# Altium PCB Copy of Bodge10080.PcbDoc
Units mm, origin at the board's own origin, x right, y up, seen from the top; angles counter-clockwise.
Board outline 100 x 80 mm, 2 copper layers (Top Layer, Bottom Layer); 8 components, 30 nets, 630 pads, 72 vias.
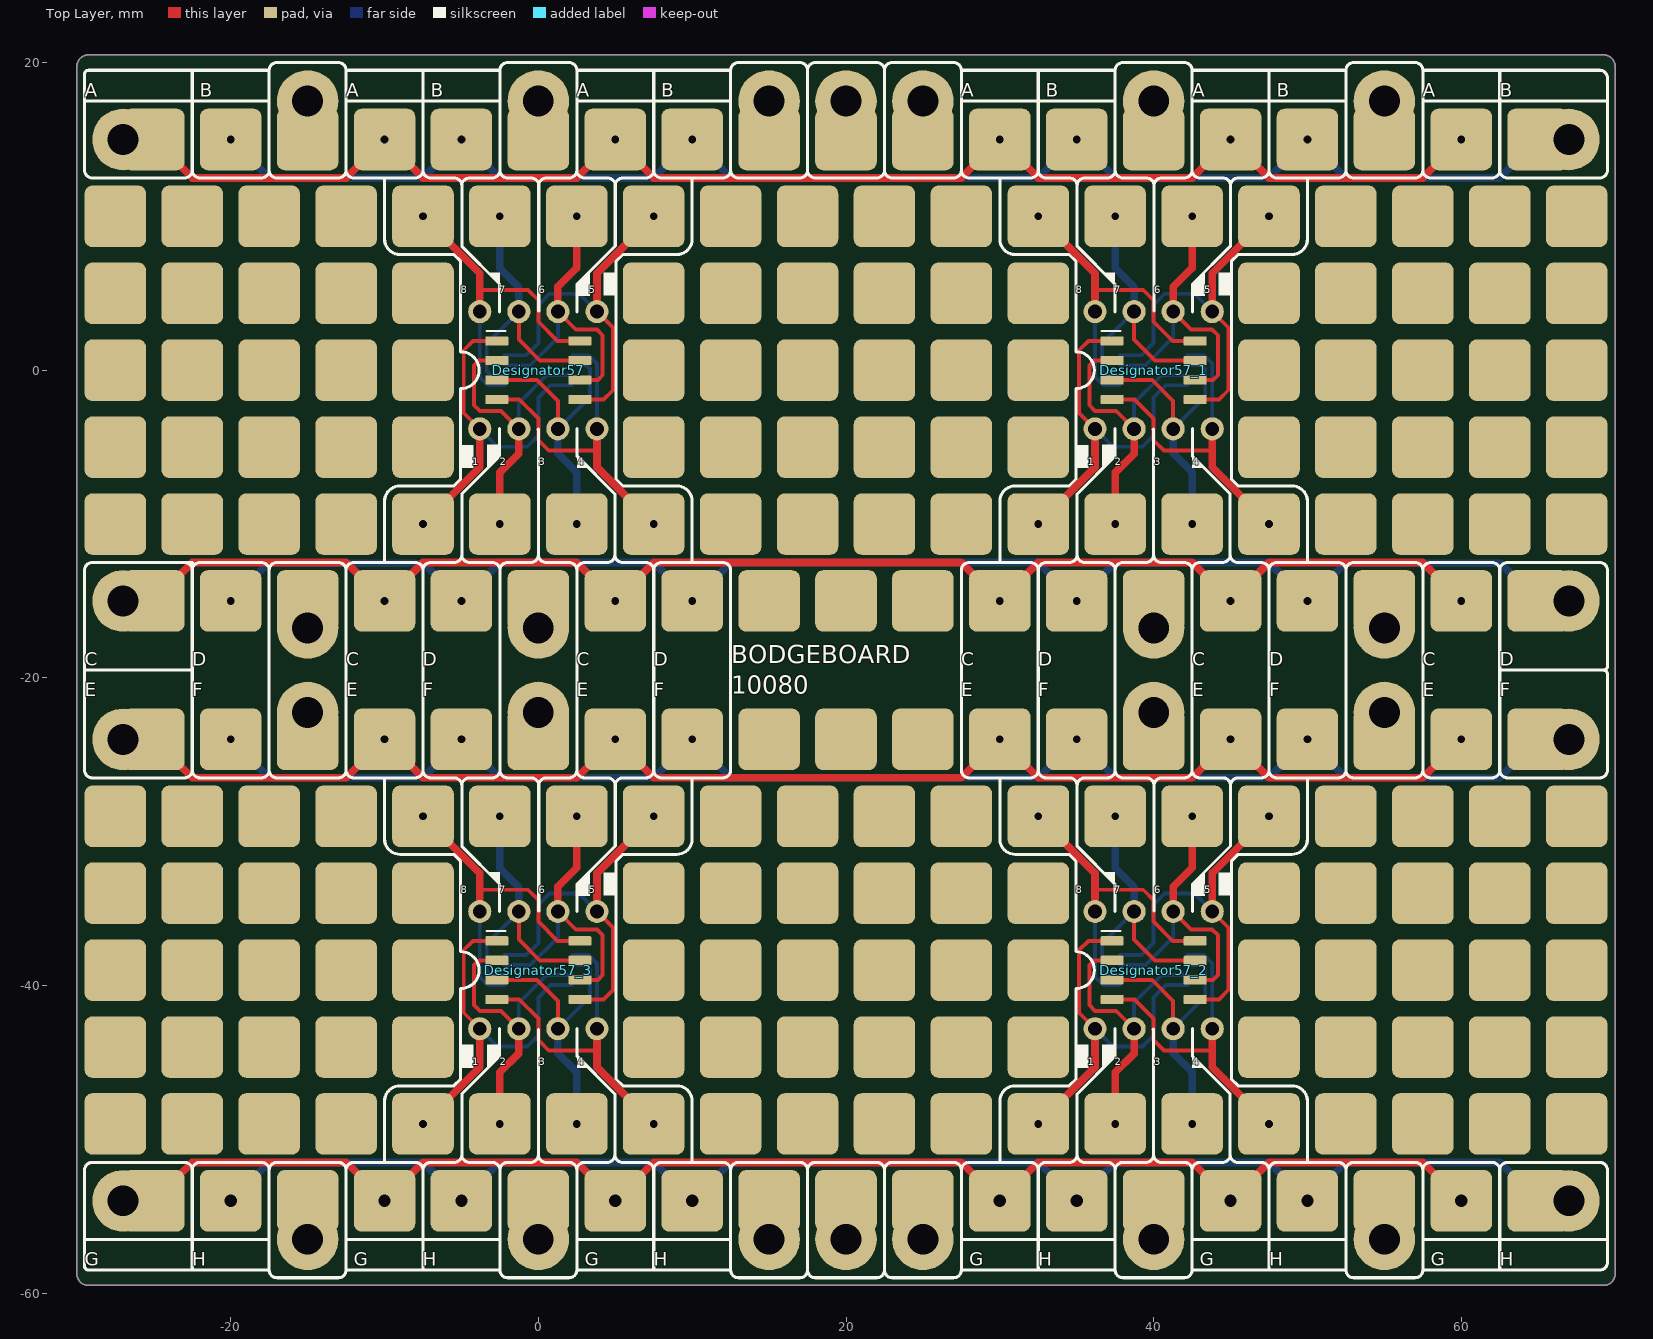
[diagram p0: Top Layer view]
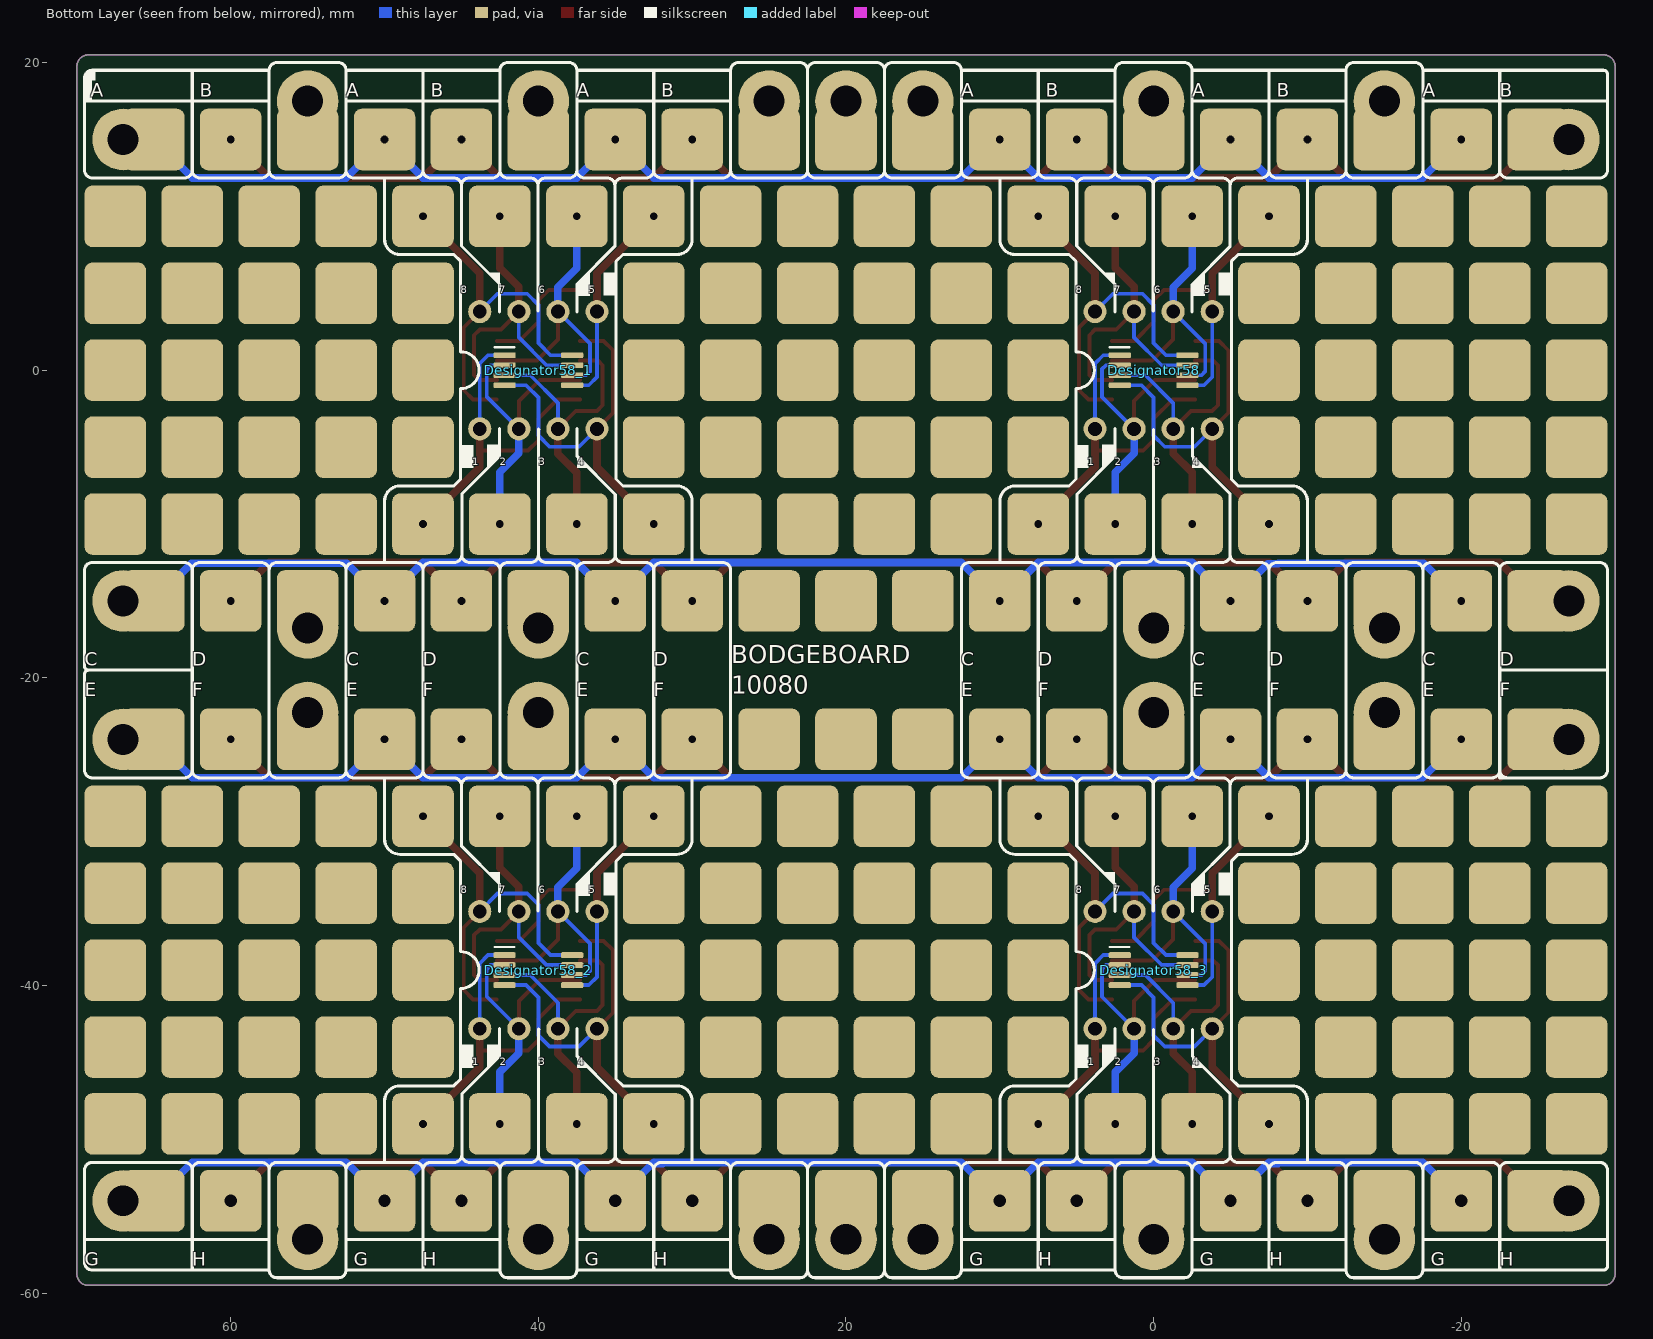
[diagram p1: Bottom Layer view, seen from below]

## Layer stack, top to bottom
Top Solder: solder mask 0.0102, Solder Resist, Dk 3.5
Top Layer: signal copper 0.0356
Dielectric 1: dielectric 0.32, FR-4, Dk 4.8
Bottom Layer: signal copper 0.0356
Bottom Solder: solder mask 0.0102, Solder Resist, Dk 3.5

## Board outline
-30,-58.75 -30,19.75 cw(c-29.25,19.75) -29.25,20.5 69.25,20.5 cw(c69.25,19.75) 70,19.75 70,-58.75 cw(c69.25,-58.75) 69.25,-59.5 -29.25,-59.5 cw(c-29.25,-58.75)

## Design rules (kind name [scope] priority, off if disabled: settings)
Clearance [All] p1: gap=0.2 ignorepadtopadclearanceinfootprint=FALSE
MinimumSolderMaskSliver [All] p1: minsoldermaskwidth=0.15
PolygonConnect [All] p1: connectstyle=Relief reliefconductorwidth=0.254 reliefentries=4 polygonreliefangle="90 Angle" airgapwidth=0.254
RoutingVias [All] p1: holewidth=0.4 width=0.8 viastyle="Through Hole" minholewidth=0.3 minwidth=0.4 maxholewidth=0.7 maxwidth=1
SilkToSilkClearance [All] p1 off: silktosilkclearance=0
SilkToSolderMaskClearance [IsPad] p1: minsilkscreentomaskgap=0.15 clearancetoexposedcopper=TRUE
SolderMaskExpansion [All] p1: expansion=0.102 istentingtop=FALSE
Width [All] p1: maxlimit=1 minlimit=0.2 preferedwidth=0.5
27 further rules are at their usual default settings.

## Components (designator, comment, footprint, x,y, rotation, side; value= is the part's Value field where it differs from the comment)
Designator57 "Comment" SO127P600X500-8 0,0 r0 top locked
Designator57_1 "Comment" SO127P600X500-8 40,0 r0 top locked
Designator57_2 "Comment" SO127P600X500-8 40,-39 r0 top locked
Designator57_3 "Comment" SO127P600X500-8 0,-39 r0 top locked
Designator58 "Comment" SO65P490X300-8 0,0 r180 bottom locked
Designator58_1 "Comment" SO65P490X300-8 40,0 r180 bottom locked
Designator58_2 "Comment" SO65P490X300-8 40,-39 r180 bottom locked
Designator58_3 "Comment" SO65P490X300-8 0,-39 r180 bottom locked

## Footprints (in the part's own frame and the unit in brackets; to place one, negate y for a bottom-side part, rotate by r counter-clockwise, add the part's x,y. Pads: shape width x height; smd on the part's side, far side on the other; paste and mask are expansions set on the pad)
SO65P490X300-8 [mm] "SO 0.65mm Pitch , 4.9mm Span, 3.00mm Body width, 8 Pins"
  rrect50% 1.45x0.38 smd paste+0 mask+0.05: 1(-2.2,0.975) 2(-2.2,0.325) 3(-2.2,-0.325) 4(-2.2,-0.975) 5(2.2,-0.975) 6(2.2,-0.325) 7(2.2,0.325) 8(2.2,0.975)
  silkscreen extent -2.85,1.5 -1.58,1.5, body extent -2.45,-1.5 2.45,1.5, height 1.1
SO127P600X500-8 [mm] "SO 1.27mm Pitch, 6.00mm Span, 5mm Body Width, 8 Pins"
  rrect25% 1.5x0.6 smd paste+0 mask+0.05: 1(-2.7,1.905) 2(-2.7,0.635) 3(-2.7,-0.635) 4(-2.7,-1.905) 5(2.7,-1.905) 6(2.7,-0.635) 7(2.7,0.635) 8(2.7,1.905)
  silkscreen extent -3.38,2.55 -2.15,2.55, body extent -3,-2.5 3,2.5, height 1.75

## Free pads (board coordinates)
  rrect25% 4x4 smd mask+0.1: 1(-27.5,-49) 1(-27.5,-44) 1(-27.5,-39) 1(-27.5,-34) 1(-27.5,-29) 1(-27.5,-10) 1(-27.5,-5) 1(-27.5,0) 1(-27.5,5) 1(-27.5,10) 3(-22.5,-49) 3(-22.5,-44) 3(-22.5,-39) 3(-22.5,-34) 3(-22.5,-29) 3(-22.5,-10) 3(-22.5,-5) 3(-22.5,0) 3(-22.5,5) 3(-22.5,10) 4(-17.5,-49) 4(-17.5,-44) 4(-17.5,-39) 4(-17.5,-34) 4(-17.5,-29) 4(-17.5,-10) 4(-17.5,-5) 4(-17.5,0) 4(-17.5,5) 4(-17.5,10) 5(-12.5,-49) 5(-12.5,-44) 5(-12.5,-39) 5(-12.5,-34) 5(-12.5,-29) 5(-12.5,-10) 5(-12.5,-5) 5(-12.5,0) 5(-12.5,5) 5(-12.5,10) 6(-7.5,-49) 6(-7.5,-44) 6(-7.5,-39) 6(-7.5,-34) 6(-7.5,-29) 6(-7.5,-10) 6(-7.5,-5) 6(-7.5,0) 6(-7.5,5) 6(-7.5,10) 6(32.5,-49) 6(32.5,-44) 6(32.5,-39) 6(32.5,-34) 6(32.5,-29) 6(32.5,-10) 6(32.5,-5) 6(32.5,0) 6(32.5,5) 6(32.5,10) 7(-2.5,-49) 7(-2.5,-29) 7(-2.5,-10) 7(-2.5,10) 7(37.5,-49) 7(37.5,-29) 7(37.5,-10) 7(37.5,10) 8(2.5,-49) 8(2.5,-29) 8(2.5,-10) 8(2.5,10) 8(42.5,-49) 8(42.5,-29) 8(42.5,-10) 8(42.5,10) 9(7.5,-49) 9(7.5,-44) 9(7.5,-39) 9(7.5,-34) 9(7.5,-29) 9(7.5,-10) 9(7.5,-5) 9(7.5,0) 9(7.5,5) 9(7.5,10) 9(47.5,-49) 9(47.5,-44) 9(47.5,-39) 9(47.5,-34) 9(47.5,-29) 9(47.5,-10) 9(47.5,-5) 9(47.5,0) 9(47.5,5) 9(47.5,10) 10(12.5,-49) 10(12.5,-44) 10(12.5,-39) 10(12.5,-34) 10(12.5,-29) 10(12.5,-10) 10(12.5,-5) 10(12.5,0) 10(12.5,5) 10(12.5,10) 11(17.5,-49) 11(17.5,-44) 11(17.5,-39) 11(17.5,-34) 11(17.5,-29) 11(17.5,-10) 11(17.5,-5) 11(17.5,0) 11(17.5,5) 11(17.5,10) 12(22.5,-49) 12(22.5,-44) 12(22.5,-39) 12(22.5,-34) 12(22.5,-29) 12(22.5,-10) 12(22.5,-5) 12(22.5,0) 12(22.5,5) 12(22.5,10) 13(27.5,-49) 13(27.5,-44) 13(27.5,-39) 13(27.5,-34) 13(27.5,-29) 13(27.5,-10) 13(27.5,-5) 13(27.5,0) 13(27.5,5) 13(27.5,10) 18(52.5,-49) 18(52.5,-44) 18(52.5,-39) 18(52.5,-34) 18(52.5,-29) 18(52.5,-10) 18(52.5,-5) 18(52.5,0) 18(52.5,5) 18(52.5,10) 19(57.5,-49) 19(57.5,-44) 19(57.5,-39) 19(57.5,-34) 19(57.5,-29) 19(57.5,-10) 19(57.5,-5) 19(57.5,0) 19(57.5,5) 19(57.5,10) 20(62.5,-49) 20(62.5,-44) 20(62.5,-39) 20(62.5,-34) 20(62.5,-29) 20(62.5,-10) 20(62.5,-5) 20(62.5,0) 20(62.5,5) 20(62.5,10) 21(67.5,-49) 21(67.5,-44) 21(67.5,-39) 21(67.5,-34) 21(67.5,-29) 21(67.5,-10) 21(67.5,-5) 21(67.5,0) 21(67.5,5) 21(67.5,10) 23(60,-54) 23(60,-24) 23(60,-15) 23(60,15) 25(50,-54) 25(50,-24) 25(50,-15) 25(50,15) 26(45,-54) 26(45,-24) 26(45,-15) 26(45,15) 28(35,-54) 28(35,-24) 28(35,-15) 28(35,15) 29(30,-54) 29(30,-24) 29(30,-15) 29(30,15) 30(25,-24) 30(25,-15) 31(20,-24) 31(20,-15) 32(15,-24) 32(15,-15) 33(10,-54) 33(10,-24) 33(10,-15) 33(10,15) 34(5,-54) 34(5,-24) 34(5,-15) 34(5,15) 36(-5,-54) 36(-5,-24) 36(-5,-15) 36(-5,15) 37(-10,-54) 37(-10,-24) 37(-10,-15) 37(-10,15) 39(-20,-54) 39(-20,-24) 39(-20,-15) 39(-20,15)
  round 4 hole 2 mask-0.5: 1(-27,-54) 1(-27,-24) 1(-27,-15) 1(-27,15) 1(-15,-56.5) 1(-15,-22.25) 1(-15,-16.75) 1(-15,17.5) 1(0,-22.25) 1(0,-16.75) 1(0,-56.5) 1(0,17.5) 1(15,-56.5) 1(15,17.5) 1(20,-56.5) 1(20,17.5) 1(25,-56.5) 1(25,17.5) 1(40,-56.5) 1(40,17.5) 1(40,-22.25) 1(40,-16.75) 1(55,-56.5) 1(55,-22.25) 1(55,-16.75) 1(55,17.5) 2(67,-54) 2(67,-24) 2(67,-15) 2(67,15)
  round 1.5 hole 0.9: 1(-3.81,-42.81) 1(-3.81,-3.81) 1(36.19,-42.81) 1(36.19,-3.81) 2(-1.27,-42.81) 2(-1.27,-3.81) 2(38.73,-42.81) 2(38.73,-3.81) 3(1.27,-42.81) 3(1.27,-3.81) 3(41.27,-42.81) 3(41.27,-3.81) 4(3.81,-42.81) 4(3.81,-3.81) 4(43.81,-42.81) 4(43.81,-3.81) 5(3.81,-35.19) 5(3.81,3.81) 5(43.81,-35.19) 5(43.81,3.81) 6(1.27,-35.19) 6(1.27,3.81) 6(41.27,-35.19) 6(41.27,3.81) 7(-1.27,-35.19) 7(-1.27,3.81) 7(38.73,-35.19) 7(38.73,3.81) 8(-3.81,-35.19) 8(-3.81,3.81) 8(36.19,-35.19) 8(36.19,3.81)
  rrect25% 4x4 smd far side mask+0.1: 1(67.5,-49) 1(67.5,-44) 1(67.5,-39) 1(67.5,-34) 1(67.5,-29) 1(67.5,-10) 1(67.5,-5) 1(67.5,0) 1(67.5,5) 1(67.5,10) 3(62.5,-49) 3(62.5,-44) 3(62.5,-39) 3(62.5,-34) 3(62.5,-29) 3(62.5,-10) 3(62.5,-5) 3(62.5,0) 3(62.5,5) 3(62.5,10) 4(57.5,-49) 4(57.5,-44) 4(57.5,-39) 4(57.5,-34) 4(57.5,-29) 4(57.5,-10) 4(57.5,-5) 4(57.5,0) 4(57.5,5) 4(57.5,10) 5(52.5,-49) 5(52.5,-44) 5(52.5,-39) 5(52.5,-34) 5(52.5,-29) 5(52.5,-10) 5(52.5,-5) 5(52.5,0) 5(52.5,5) 5(52.5,10) 10(27.5,-49) 10(27.5,-44) 10(27.5,-39) 10(27.5,-34) 10(27.5,-29) 10(27.5,-10) 10(27.5,-5) 10(27.5,0) 10(27.5,5) 10(27.5,10) 11(22.5,-49) 11(22.5,-44) 11(22.5,-39) 11(22.5,-34) 11(22.5,-29) 11(22.5,-10) 11(22.5,-5) 11(22.5,0) 11(22.5,5) 11(22.5,10) 12(17.5,-49) 12(17.5,-44) 12(17.5,-39) 12(17.5,-34) 12(17.5,-29) 12(17.5,-10) 12(17.5,-5) 12(17.5,0) 12(17.5,5) 12(17.5,10) 13(12.5,-49) 13(12.5,-44) 13(12.5,-39) 13(12.5,-34) 13(12.5,-29) 13(12.5,-10) 13(12.5,-5) 13(12.5,0) 13(12.5,5) 13(12.5,10) 14(7.5,-49) 14(7.5,-44) 14(7.5,-39) 14(7.5,-34) 14(7.5,-29) 14(7.5,-10) 14(7.5,-5) 14(7.5,0) 14(7.5,5) 14(7.5,10) 14(47.5,-49) 14(47.5,-44) 14(47.5,-39) 14(47.5,-34) 14(47.5,-29) 14(47.5,-10) 14(47.5,-5) 14(47.5,0) 14(47.5,5) 14(47.5,10) 15(2.5,-49) 15(2.5,-29) 15(2.5,-10) 15(2.5,10) 15(42.5,-49) 15(42.5,-29) 15(42.5,-10) 15(42.5,10) 16(-2.5,-49) 16(-2.5,-29) 16(-2.5,-10) 16(-2.5,10) 16(37.5,-49) 16(37.5,-29) 16(37.5,-10) 16(37.5,10) 17(-7.5,-49) 17(-7.5,-44) 17(-7.5,-39) 17(-7.5,-34) 17(-7.5,-29) 17(-7.5,-10) 17(-7.5,-5) 17(-7.5,0) 17(-7.5,5) 17(-7.5,10) 17(32.5,-49) 17(32.5,-44) 17(32.5,-39) 17(32.5,-34) 17(32.5,-29) 17(32.5,-10) 17(32.5,-5) 17(32.5,0) 17(32.5,5) 17(32.5,10) 18(-12.5,-49) 18(-12.5,-44) 18(-12.5,-39) 18(-12.5,-34) 18(-12.5,-29) 18(-12.5,-10) 18(-12.5,-5) 18(-12.5,0) 18(-12.5,5) 18(-12.5,10) 19(-17.5,-49) 19(-17.5,-44) 19(-17.5,-39) 19(-17.5,-34) 19(-17.5,-29) 19(-17.5,-10) 19(-17.5,-5) 19(-17.5,0) 19(-17.5,5) 19(-17.5,10) 20(-22.5,-49) 20(-22.5,-44) 20(-22.5,-39) 20(-22.5,-34) 20(-22.5,-29) 20(-22.5,-10) 20(-22.5,-5) 20(-22.5,0) 20(-22.5,5) 20(-22.5,10) 21(-27.5,-49) 21(-27.5,-44) 21(-27.5,-39) 21(-27.5,-34) 21(-27.5,-29) 21(-27.5,-10) 21(-27.5,-5) 21(-27.5,0) 21(-27.5,5) 21(-27.5,10) 23(60,-54) 23(60,-24) 23(60,-15) 23(60,15) 25(50,-54) 25(50,-24) 25(50,-15) 25(50,15) 26(45,-54) 26(45,-24) 26(45,-15) 26(45,15) 28(35,-54) 28(35,-24) 28(35,-15) 28(35,15) 29(30,-54) 29(30,-24) 29(30,-15) 29(30,15) 30(25,-24) 30(25,-15) 31(20,-24) 31(20,-15) 32(15,-24) 32(15,-15) 33(10,-54) 33(10,-24) 33(10,-15) 33(10,15) 34(5,-54) 34(5,-24) 34(5,-15) 34(5,15) 36(-5,-54) 36(-5,-24) 36(-5,-15) 36(-5,15) 37(-10,-54) 37(-10,-24) 37(-10,-15) 37(-10,15) 39(-20,-54) 39(-20,-24) 39(-20,-15) 39(-20,15)
  rrect25% 4x4 smd mask-3: 22(65,-54) 22(65,-24) 22(65,-15) 24(55,-54) 24(55,-24) 24(55,-15) 27(40,-54) 27(40,-24) 27(40,-15) 27(40,15) 30(25,-54) 30(25,15) 31(20,-54) 31(20,15) 32(15,-54) 32(15,15) 35(0,-54) 35(0,-24) 35(0,-15) 35(0,15) 38(-15,-54) 38(-15,-24) 38(-15,-15) 38(-15,15) 40(-25,-54) 40(-25,-24) 40(-25,-15) 40(-25,15)
  rrect25% 4x4 smd far side mask-5: 22(65,-54) 22(65,-24) 22(65,-15) 24(55,-54) 24(55,-24) 24(55,-15) 24(55,15) 27(40,-54) 27(40,-24) 27(40,-15) 27(40,15) 30(25,-54) 30(25,15) 31(20,-54) 31(20,15) 32(15,-54) 32(15,15) 35(0,-54) 35(0,-24) 35(0,-15) 35(0,15) 38(-15,-54) 38(-15,-24) 38(-15,-15) 38(-15,15) 40(-25,-54) 40(-25,-24) 40(-25,-15) 40(-25,15)
  rrect25% 4x4 smd mask-4: 22(65,15)
  rrect25% 4x4 smd far side mask-4: 22(65,15)
  rrect25% 4x4 smd mask-5: 24(55,15)

## Via types
v1: diameter 1.1, hole 0.5, Top Layer to Bottom Layer, 62 vias
v2: diameter 1.3, hole 0.8, Top Layer to Bottom Layer, 10 vias

## Nets (pads, with @x,y where several pads share a name; then routed paths per layer and width w, separated by ;. In a path a pad name is that pad's centre, name@x,y a point inside that pad or via, vN(x,y) a via of type N, cw(c..) or ccw(c..) an arc to the next point about the centre after c; other vN are vias at no path point)
A: pad.1@-27,15 pad.23@60,15 pad.26@45,15 pad.29@30,15 pad.34@5,15 pad.37@-10,15 pad.40@-25,15 | length 107.4
  Top Layer w0.5: pad.1@-27,15 -25,15 -22.5,12.5 -12.5,12.5 v1(-10,15) -7.5,12.5 2.5,12.5 v1(5,15) 7.5,12.5 27.5,12.5 v1(30,15) 32.5,12.5 ; v1(60,15) 57.5,12.5 47.5,12.5 v1(45,15) 42.5,12.5 ; 32.5,12.5 42.5,12.5 ; 32.5,12.5 42.5,12.5
B: pad.2@67,15 pad.22@65,15 pad.25@50,15 pad.28@35,15 pad.33@10,15 pad.36@-5,15 pad.39@-20,15 | length 107.4
  Bottom Layer w0.5: v1(-20,15) -17.5,12.5 -7.5,12.5 v1(-5,15) -2.5,12.5 7.5,12.5 v1(10,15) 12.5,12.5 32.5,12.5 v1(35,15) 37.5,12.5 ; pad.2@67,15 65,15 62.5,12.5 52.5,12.5 v1(50,15) 47.5,12.5 ; 37.5,12.5 47.5,12.5 ; 37.5,12.5 47.5,12.5
C: pad.1@-27,-15 pad.23@60,-15 pad.26@45,-15 pad.29@30,-15 pad.34@5,-15 pad.37@-10,-15 pad.40@-25,-15 | length 107.4
  Top Layer w0.5: pad.1@-27,-15 -25,-15 -22.5,-12.5 -12.5,-12.5 v1(-10,-15) -7.5,-12.5 2.5,-12.5 v1(5,-15) 7.5,-12.5 27.5,-12.5 v1(30,-15) 32.5,-12.5 ; v1(60,-15) 57.5,-12.5 47.5,-12.5 v1(45,-15) 42.5,-12.5 ; 32.5,-12.5 42.5,-12.5 ; 32.5,-12.5 42.5,-12.5
D: pad.2@67,-15 pad.22@65,-15 pad.25@50,-15 pad.28@35,-15 pad.33@10,-15 pad.36@-5,-15 pad.39@-20,-15 | length 107.3
  Bottom Layer w0.5: v1(-20,-15) -17.55,-12.55 -8.107,-12.55 -8.082,-12.575 -7.425,-12.575 v1(-5,-15) -2.5,-12.5 7.5,-12.5 v1(10,-15) 12.5,-12.5 32.5,-12.5 v1(35,-15) 37.5,-12.5 ; pad.2@67,-15 65,-15 62.55,-12.55 52.45,-12.55 v1(50,-15) 47.5,-12.5 ; 37.5,-12.5 47.5,-12.5 ; 37.5,-12.5 47.5,-12.5
E: pad.1@-27,-24 pad.23@60,-24 pad.26@45,-24 pad.29@30,-24 pad.34@5,-24 pad.37@-10,-24 pad.40@-25,-24 | length 117.4
  Top Layer w0.5: pad.1@-27,-24 -25,-24 -22.5,-26.5 -12.5,-26.5 v1(-10,-24) -7.5,-26.5 ; v1(60,-24) 57.5,-26.5 47.5,-26.5 v1(45,-24) 42.5,-26.5 ; -7.5,-26.5 2.5,-26.5 ; -7.5,-26.5 2.5,-26.5 ; 2.5,-26.5 v1(5,-24) 7.5,-26.5 27.5,-26.5 v1(30,-24) 32.5,-26.5 ; 32.5,-26.5 42.5,-26.5 ; 32.5,-26.5 42.5,-26.5
F: pad.2@67,-24 pad.22@65,-24 pad.25@50,-24 pad.28@35,-24 pad.33@10,-24 pad.36@-5,-24 pad.39@-20,-24 | length 117.4
  Bottom Layer w0.5: v1(-20,-24) -17.5,-26.5 -7.5,-26.5 v1(-5,-24) -2.5,-26.5 ; pad.2@67,-24 65,-24 62.5,-26.5 52.5,-26.5 v1(50,-24) 47.5,-26.5 ; -2.5,-26.5 7.5,-26.5 ; -2.5,-26.5 7.5,-26.5 ; 7.5,-26.5 v1(10,-24) 12.5,-26.5 32.5,-26.5 v1(35,-24) 37.5,-26.5 ; 37.5,-26.5 47.5,-26.5 ; 37.5,-26.5 47.5,-26.5
G: pad.1@-27,-54 pad.23@60,-54 pad.26@45,-54 pad.29@30,-54 pad.34@5,-54 pad.37@-10,-54 pad.40@-25,-54 | length 116.6
  Top Layer w0.5: pad.1@-27,-54 -25,-54 -22.5,-51.5 -12.5,-51.5 v2(-10,-54) -7.5,-51.5 ; pad.29@29.5,-53.5 27.5,-51.5 7.5,-51.5 v2(5,-54) 2.5,-51.5 ; v2(30,-54) 32.5,-51.5 ; v2(60,-54) 57.5,-51.5 47.5,-51.5 v2(45,-54) 42.5,-51.5 ; -7.5,-51.5 2.5,-51.5 ; -7.5,-51.5 2.5,-51.5 ; 32.5,-51.5 42.5,-51.5 ; 32.5,-51.5 42.5,-51.5
H: pad.2@67,-54 pad.22@65,-54 pad.25@50,-54 pad.28@35,-54 pad.33@10,-54 pad.36@-5,-54 pad.39@-20,-54 | length 118.7
  Bottom Layer w0.5: v2(-20,-54) -17.5,-51.5 -7.5,-51.5 v2(-5,-54) -2.5,-51.5 ; -8.107,-51.55 -8.082,-51.575 -7.425,-51.575 ; 31.893,-51.55 31.918,-51.575 32.575,-51.575 ; pad.2@67,-54 65,-54 62.5,-51.5 52.5,-51.5 v2(50,-54) 47.5,-51.5 ; -2.5,-51.5 7.5,-51.5 ; -2.5,-51.5 7.5,-51.5 ; 7.5,-51.5 v2(10,-54) 12.5,-51.5 32.5,-51.5 v2(35,-54) 37.5,-51.5 ; 37.5,-51.5 47.5,-51.5 ; 37.5,-51.5 47.5,-51.5
IO1: pad.1@-15,17.5 pad.38@-15,15
IO2: pad.1@0,17.5 pad.35@0,15
IO3: pad.1@15,17.5 pad.32@15,15
IO4: pad.1@20,17.5 pad.31@20,15
IO5: pad.1@25,17.5 pad.30@25,15
IO6: pad.1@40,17.5 pad.27@40,15
IO7: pad.1@55,17.5 pad.24@55,15
IO8: pad.1@55,-56.5 pad.24@55,-54
IO9: pad.1@40,-56.5 pad.27@40,-54
IO10: pad.1@25,-56.5 pad.30@25,-54
IO11: pad.1@20,-56.5 pad.31@20,-54
IO12: pad.1@15,-56.5 pad.32@15,-54
IO13: pad.1@0,-56.5 pad.35@0,-54
IO14: pad.1@-15,-56.5 pad.38@-15,-54
UA1: Designator57.1 Designator58.4 pad.1@-3.81,-3.81 pad.6@-7.5,-10 pad.17@-7.5,-10 | length 25.3
  Top Layer w0.25: pad.1@-3.81,-3.81 -4.85,-2.77 -4.85,1.3 -4.245,1.905 -3.695,1.905 Designator57.1
  Top Layer w0.5: v1(-7.5,-10) -3.81,-6.31 pad.1@-3.81,-3.81
  Bottom Layer w0.25: pad.1@-3.81,-3.81 -2.645,-4.975 -0.725,-4.975 0,-4.25 0,-1.775 0.8,-0.975 Designator58.4
UA2: Designator57.2 Designator58.3 pad.2@-1.27,-3.81 pad.7@-2.5,-10 pad.16@-2.5,-10 | length 20.3
  Top Layer w0.254: Designator57.2 -3.865,0.635 -4.175,0.325 -4.175,-2.275 -3.8,-2.65 -2.43,-2.65 pad.2@-1.27,-3.81
  Top Layer w0.5: v1(-2.5,-10) -2.5,-6.65 -1.27,-5.42 pad.2@-1.27,-3.81
  Bottom Layer w0.25: pad.2@-1.27,-3.81 -1.27,-2.12 0.525,-0.325 Designator58.3
UA3: Designator57.3 Designator58.2 pad.3@1.27,-3.81 pad.8@2.5,-10 pad.15@2.5,-10 | length 19
  Top Layer w0.254: Designator57.3 -0.915,-0.635 -0.09,-0.635 1.27,-1.995 pad.3@1.27,-3.81
  Bottom Layer w0.25: pad.3@1.27,-3.81 3.35,-1.73 3.35,0.075 3.1,0.325 Designator58.2
  Bottom Layer w0.5: pad.3@1.27,-3.81 1.27,-5.395 2.5,-6.625 v1(2.5,-10)
UA4: Designator57.4 Designator58.1 pad.4@3.81,-3.81 pad.9@7.5,-10 pad.14@7.5,-10 | length 22.5
  Top Layer w0.25: -1.65,-1.905 -1.245,-1.905 0,-3.15 0,-4.55 0.675,-5.225 3.785,-5.225 3.81,-5.25
  Top Layer w0.254: Designator57.4 -1.65,-1.905
  Top Layer w0.5: pad.4@3.81,-3.81 3.81,-5.25 3.81,-6.31 v1(7.5,-10)
  Bottom Layer w0.25: Designator58.1 3.275,0.975 3.81,0.44 pad.4@3.81,-3.81
UA5: Designator57.5 Designator58.8 pad.5@3.81,3.81 pad.9@7.5,10 pad.14@7.5,10 | length 25.3
  Top Layer w0.25: Designator57.5 3.695,-1.905 4.245,-1.905 4.85,-1.3 4.85,2.77 pad.5@3.81,3.81
  Top Layer w0.5: pad.5@3.81,3.81 3.81,6.31 v1(7.5,10)
  Bottom Layer w0.25: Designator58.8 -0.8,0.975 0,1.775 0,4.25 0.725,4.975 2.645,4.975 pad.5@3.81,3.81
UA6: Designator57.6 Designator58.7 pad.6@1.27,3.81 pad.8@2.5,10 pad.15@2.5,10 | length 20.3
  Top Layer w0.254: pad.6@1.27,3.81 2.43,2.65 3.8,2.65 4.175,2.275 4.175,-0.325 3.865,-0.635 Designator57.6
  Top Layer w0.5: pad.6@1.27,3.81 1.27,5.42 2.5,6.65 v1(2.5,10)
  Bottom Layer w0.25: Designator58.7 -0.525,0.325 1.27,2.12 pad.6@1.27,3.81
UA7: Designator57.7 Designator58.6 pad.7@-1.27,3.81 pad.7@-2.5,10 pad.16@-2.5,10 | length 19
  Top Layer w0.254: pad.7@-1.27,3.81 -1.27,1.995 0.09,0.635 0.915,0.635 Designator57.7
  Bottom Layer w0.25: Designator58.6 -3.1,-0.325 -3.35,-0.075 -3.35,1.73 pad.7@-1.27,3.81
  Bottom Layer w0.5: v1(-2.5,10) -2.5,6.625 -1.27,5.395 pad.7@-1.27,3.81
UA8: Designator57.8 Designator58.5 pad.6@-7.5,10 pad.8@-3.81,3.81 pad.17@-7.5,10 | length 22.5
  Top Layer w0.25: -3.81,5.25 -3.785,5.225 -0.675,5.225 0,4.55 0,3.15 1.245,1.905 1.65,1.905
  Top Layer w0.254: 1.65,1.905 Designator57.8
  Top Layer w0.5: v1(-7.5,10) -3.81,6.31 pad.8@-3.81,3.81
  Bottom Layer w0.25: pad.8@-3.81,3.81 -3.81,-0.44 -3.275,-0.975 Designator58.5
pads on no net: Designator57_1.1 Designator57_1.2 Designator57_1.3 Designator57_1.4 Designator57_1.5 Designator57_1.6 Designator57_1.7 Designator57_1.8 Designator57_2.1 Designator57_2.2 Designator57_2.3 Designator57_2.4 Designator57_2.5 Designator57_2.6 Designator57_2.7 Designator57_2.8 Designator57_3.1 Designator57_3.2 Designator57_3.3 Designator57_3.4 Designator57_3.5 Designator57_3.6 Designator57_3.7 Designator57_3.8 Designator58_1.1 Designator58_1.2 Designator58_1.3 Designator58_1.4 Designator58_1.5 Designator58_1.6 Designator58_1.7 Designator58_1.8 Designator58_2.1 Designator58_2.2 Designator58_2.3 Designator58_2.4 Designator58_2.5 Designator58_2.6 Designator58_2.7 Designator58_2.8 Designator58_3.1 Designator58_3.2 Designator58_3.3 Designator58_3.4 Designator58_3.5 Designator58_3.6 Designator58_3.7 Designator58_3.8
copper on no net: | length 523
  Top Layer w0.25: -3.81,-42.81 -4.85,-41.77 -4.85,-37.7 -4.245,-37.095 -3.695,-37.095 -2.7,-37.095 ; -3.81,-33.75 -3.785,-33.775 -0.675,-33.775 0,-34.45 0,-35.85 1.245,-37.095 1.65,-37.095 ; -1.65,-40.905 -1.245,-40.905 0,-42.15 0,-43.55 0.675,-44.225 3.785,-44.225 3.81,-44.25 ; 2.7,-40.905 3.695,-40.905 4.245,-40.905 4.85,-40.3 4.85,-36.23 3.81,-35.19 ; 36.19,-42.81 35.15,-41.77 35.15,-37.7 35.755,-37.095 36.305,-37.095 37.3,-37.095 ; 36.19,-33.75 36.215,-33.775 39.325,-33.775 40,-34.45 40,-35.85 41.245,-37.095 41.65,-37.095 ; 36.19,-3.81 35.15,-2.77 35.15,1.3 35.755,1.905 36.305,1.905 37.3,1.905 ; 36.19,5.25 36.215,5.225 39.325,5.225 40,4.55 40,3.15 41.245,1.905 41.65,1.905 ; 38.35,-40.905 38.755,-40.905 40,-42.15 40,-43.55 40.675,-44.225 43.785,-44.225 43.81,-44.25 ; 38.35,-1.905 38.755,-1.905 40,-3.15 40,-4.55 40.675,-5.225 43.785,-5.225 43.81,-5.25 ; 42.7,-40.905 43.695,-40.905 44.245,-40.905 44.85,-40.3 44.85,-36.23 43.81,-35.19 ; 42.7,-1.905 43.695,-1.905 44.245,-1.905 44.85,-1.3 44.85,2.77 43.81,3.81
  Top Layer w0.254: -2.7,-40.905 -1.65,-40.905 ; -2.7,-39.635 -0.915,-39.635 -0.09,-39.635 1.27,-40.995 1.27,-42.81 ; -2.7,-38.365 -3.865,-38.365 -4.175,-38.675 -4.175,-41.275 -3.8,-41.65 -2.43,-41.65 -1.27,-42.81 ; -1.27,-35.19 -1.27,-37.005 0.09,-38.365 0.915,-38.365 2.7,-38.365 ; 1.27,-35.19 2.43,-36.35 3.8,-36.35 4.175,-36.725 4.175,-39.325 3.865,-39.635 2.7,-39.635 ; 1.65,-37.095 2.7,-37.095 ; 37.3,-40.905 38.35,-40.905 ; 37.3,-39.635 39.085,-39.635 39.91,-39.635 41.27,-40.995 41.27,-42.81 ; 37.3,-38.365 36.135,-38.365 35.825,-38.675 35.825,-41.275 36.2,-41.65 37.57,-41.65 38.73,-42.81 ; 37.3,-1.905 38.35,-1.905 ; 37.3,-0.635 39.085,-0.635 39.91,-0.635 41.27,-1.995 41.27,-3.81 ; 37.3,0.635 36.135,0.635 35.825,0.325 35.825,-2.275 36.2,-2.65 37.57,-2.65 38.73,-3.81 ; 38.73,-35.19 38.73,-37.005 40.09,-38.365 40.915,-38.365 42.7,-38.365 ; 38.73,3.81 38.73,1.995 40.09,0.635 40.915,0.635 42.7,0.635 ; 41.27,-35.19 42.43,-36.35 43.8,-36.35 44.175,-36.725 44.175,-39.325 43.865,-39.635 42.7,-39.635 ; 41.27,3.81 42.43,2.65 43.8,2.65 44.175,2.275 44.175,-0.325 43.865,-0.635 42.7,-0.635 ; 41.65,-37.095 42.7,-37.095 ; 41.65,1.905 42.7,1.905
  Top Layer w0.5: v1(-7.5,-49) -3.81,-45.31 -3.81,-42.81 ; v1(-7.5,-29) -3.81,-32.69 -3.81,-35.19 ; v1(-2.5,-49) -2.5,-45.65 -1.27,-44.42 -1.27,-42.81 ; 1.27,-35.19 1.27,-33.58 2.5,-32.35 v1(2.5,-29) ; 3.81,-42.81 3.81,-44.25 3.81,-45.31 v1(7.5,-49) ; 3.81,-35.19 3.81,-32.69 v1(7.5,-29) ; v1(32.5,-49) 36.19,-45.31 36.19,-42.81 ; v1(32.5,-29) 36.19,-32.69 36.19,-35.19 ; v1(32.5,-10) 36.19,-6.31 36.19,-3.81 ; v1(32.5,10) 36.19,6.31 36.19,3.81 ; v1(37.5,-49) 37.5,-45.65 38.73,-44.42 38.73,-42.81 ; v1(37.5,-10) 37.5,-6.65 38.73,-5.42 38.73,-3.81 ; 41.27,-35.19 41.27,-33.58 42.5,-32.35 v1(42.5,-29) ; 41.27,3.81 41.27,5.42 42.5,6.65 v1(42.5,10) ; 43.81,-42.81 43.81,-44.25 43.81,-45.31 v1(47.5,-49) ; 43.81,-35.19 43.81,-32.69 v1(47.5,-29) ; 43.81,-3.81 43.81,-5.25 43.81,-6.31 v1(47.5,-10) ; 43.81,3.81 43.81,6.31 v1(47.5,10)
  Bottom Layer w0.25: -3.81,-42.81 -2.645,-43.975 -0.725,-43.975 0,-43.25 0,-40.775 0.8,-39.975 2.2,-39.975 ; -3.81,-35.19 -3.81,-39.44 -3.275,-39.975 -2.2,-39.975 ; -2.2,-39.325 -3.1,-39.325 -3.35,-39.075 -3.35,-37.27 -1.27,-35.19 ; -2.2,-38.675 -0.525,-38.675 1.27,-36.88 1.27,-35.19 ; -2.2,-38.025 -0.8,-38.025 0,-37.225 0,-34.75 0.725,-34.025 2.645,-34.025 3.81,-35.19 ; -1.27,-42.81 -1.27,-41.12 0.525,-39.325 2.2,-39.325 ; 1.27,-42.81 3.35,-40.73 3.35,-38.925 3.1,-38.675 2.2,-38.675 ; 2.2,-38.025 3.275,-38.025 3.81,-38.56 3.81,-42.81 ; 36.19,-42.81 37.355,-43.975 39.275,-43.975 40,-43.25 40,-40.775 40.8,-39.975 42.2,-39.975 ; 36.19,-35.19 36.19,-39.44 36.725,-39.975 37.8,-39.975 ; 36.19,-3.81 37.355,-4.975 39.275,-4.975 40,-4.25 40,-1.775 40.8,-0.975 42.2,-0.975 ; 36.19,3.81 36.19,-0.44 36.725,-0.975 37.8,-0.975 ; 37.8,-39.325 36.9,-39.325 36.65,-39.075 36.65,-37.27 38.73,-35.19 ; 37.8,-38.675 39.475,-38.675 41.27,-36.88 41.27,-35.19 ; 37.8,-38.025 39.2,-38.025 40,-37.225 40,-34.75 40.725,-34.025 42.645,-34.025 43.81,-35.19 ; 37.8,-0.325 36.9,-0.325 36.65,-0.075 36.65,1.73 38.73,3.81 ; 37.8,0.325 39.475,0.325 41.27,2.12 41.27,3.81 ; 37.8,0.975 39.2,0.975 40,1.775 40,4.25 40.725,4.975 42.645,4.975 43.81,3.81 ; 38.73,-42.81 38.73,-41.12 40.525,-39.325 42.2,-39.325 ; 38.73,-3.81 38.73,-2.12 40.525,-0.325 42.2,-0.325 ; 41.27,-42.81 43.35,-40.73 43.35,-38.925 43.1,-38.675 42.2,-38.675 ; 41.27,-3.81 43.35,-1.73 43.35,0.075 43.1,0.325 42.2,0.325 ; 42.2,-38.025 43.275,-38.025 43.81,-38.56 43.81,-42.81 ; 42.2,0.975 43.275,0.975 43.81,0.44 43.81,-3.81
  Bottom Layer w0.5: v1(-2.5,-29) -2.5,-32.375 -1.27,-33.605 -1.27,-35.19 ; 1.27,-42.81 1.27,-44.395 2.5,-45.625 v1(2.5,-49) ; v1(37.5,-29) 37.5,-32.375 38.73,-33.605 38.73,-35.19 ; v1(37.5,10) 37.5,6.625 38.73,5.395 38.73,3.81 ; 41.27,-42.81 41.27,-44.395 42.5,-45.625 v1(42.5,-49) ; 41.27,-3.81 41.27,-5.395 42.5,-6.625 v1(42.5,-10)

## Keep-outs
Keep-Out Layer:
  lines w0.1: -30,-58.75 ccw(c-29.25,-58.75) -29.25,-59.5 -27.25,-59.5 69.25,-59.5 ccw(c69.25,-58.75) 70,-58.75 70,19.75 ccw(c69.25,19.75) 69.25,20.5 -29.25,20.5 ccw(c-29.25,19.75) -30,19.75 -30,-58.75

## Silkscreen, mask and mechanical layers (free items; w line width, h text height)
Top Overlay:
  drawing of 814 lines, arcs and shapes, not listed
  text "A" at -29.5,17.5 h1.5
  text "B" at -22,17.5 h1.5
  text "A" at -12.5,17.5 h1.5
  text "B" at -7,17.5 h1.5
  text "A" at 2.5,17.5 h1.5
  text "B" at 8,17.5 h1.5
  text "A" at 27.5,17.5 h1.5
  text "B" at 33,17.5 h1.5
  text "A" at 42.5,17.5 h1.5
  text "B" at 48,17.5 h1.5
  text "A" at 57.5,17.5 h1.5
  text "B" at 62.5,17.5 h1.5
  text "8" at -5.055,4.847 h0.8
  text "7" at -2.555,4.847 h0.8
  text "6" at 0.025,4.847 h0.8
  text "5" at 3.275,4.847 h0.8
  text "8" at 34.945,4.847 h0.8
  text "7" at 37.445,4.847 h0.8
  text "6" at 40.025,4.847 h0.8
  text "5" at 43.275,4.847 h0.8
  text "1" at -4.3,-6.35 h0.8
  text "2" at -2.525,-6.35 h0.8
  text "3" at 0.03,-6.35 h0.8
  text "4" at 2.555,-6.35 h0.8
  text "1" at 35.7,-6.35 h0.8
  text "2" at 37.475,-6.35 h0.8
  text "3" at 40.03,-6.35 h0.8
  text "4" at 42.555,-6.35 h0.8
  text "C" at -29.5,-19.5 h1.5
  text "D" at -22.5,-19.5 h1.5
  text "C" at -12.5,-19.5 h1.5
  text "D" at -7.5,-19.5 h1.5
  text "C" at 2.5,-19.5 h1.5
  text "D" at 7.5,-19.5 h1.5
  text "C" at 27.5,-19.5 h1.5
  text "D" at 32.5,-19.5 h1.5
  text "C" at 42.5,-19.5 h1.5
  text "D" at 47.5,-19.5 h1.5
  text "C" at 57.5,-19.5 h1.5
  text "D" at 62.5,-19.5 h1.5
  text "BODGEBOARD / 10080" at 12.55,-21.425 h2
  text "E" at -29.5,-21.5 h1.5
  text "F" at -22.5,-21.5 h1.5
  text "E" at -12.5,-21.5 h1.5
  text "F" at -7.5,-21.5 h1.5
  text "E" at 2.5,-21.5 h1.5
  text "F" at 7.5,-21.5 h1.5
  text "E" at 27.5,-21.5 h1.5
  text "F" at 32.5,-21.5 h1.5
  text "E" at 42.5,-21.5 h1.5
  text "F" at 47.5,-21.5 h1.5
  text "E" at 57.5,-21.5 h1.5
  text "F" at 62.5,-21.5 h1.5
  text "8" at -5.055,-34.153 h0.8
  text "7" at -2.555,-34.153 h0.8
  text "6" at 0.025,-34.153 h0.8
  text "5" at 3.275,-34.153 h0.8
  text "8" at 34.945,-34.153 h0.8
  text "7" at 37.445,-34.153 h0.8
  text "6" at 40.025,-34.153 h0.8
  text "5" at 43.275,-34.153 h0.8
  text "1" at -4.3,-45.35 h0.8
  text "2" at -2.525,-45.35 h0.8
  text "3" at 0.03,-45.35 h0.8
  text "4" at 2.555,-45.35 h0.8
  text "1" at 35.7,-45.35 h0.8
  text "2" at 37.475,-45.35 h0.8
  text "3" at 40.03,-45.35 h0.8
  text "4" at 42.555,-45.35 h0.8
  text "G" at -29.5,-58.5 h1.5
  text "H" at -22.5,-58.5 h1.5
  text "G" at -12,-58.5 h1.5
  text "H" at -7.5,-58.5 h1.5
  text "G" at 3,-58.5 h1.5
  text "H" at 7.5,-58.5 h1.5
  text "G" at 28,-58.5 h1.5
  text "H" at 32.5,-58.5 h1.5
  text "G" at 43,-58.5 h1.5
  text "H" at 47.5,-58.5 h1.5
  text "G" at 58,-58.5 h1.5
  text "H" at 62.5,-58.5 h1.5
Bottom Overlay:
  drawing of 673 lines, arcs and shapes, not listed
  text "B" at -22.5,17.5 h1.5
  text "A" at -17.5,17.5 h1.5
  text "B" at -8,17.5 h1.5
  text "A" at -2.5,17.5 h1.5
  text "B" at 7,17.5 h1.5
  text "A" at 12.5,17.5 h1.5
  text "B" at 32,17.5 h1.5
  text "A" at 37.5,17.5 h1.5
  text "B" at 47,17.5 h1.5
  text "A" at 52.5,17.5 h1.5
  text "B" at 62,17.5 h1.5
  text "A" at 69.1,17.5 h1.5
  text "5" at -3.275,4.847 h0.8
  text "6" at -0.025,4.847 h0.8
  text "7" at 2.555,4.847 h0.8
  text "8" at 5.055,4.847 h0.8
  text "5" at 36.725,4.847 h0.8
  text "6" at 39.975,4.847 h0.8
  text "7" at 42.555,4.847 h0.8
  text "8" at 45.055,4.847 h0.8
  text "4" at -2.555,-6.35 h0.8
  text "3" at -0.03,-6.35 h0.8
  text "2" at 2.525,-6.35 h0.8
  text "1" at 4.3,-6.35 h0.8
  text "4" at 37.445,-6.35 h0.8
  text "3" at 39.97,-6.35 h0.8
  text "2" at 42.525,-6.35 h0.8
  text "1" at 44.3,-6.35 h0.8
  text "D" at -22.5,-19.5 h1.5
  text "C" at -17.5,-19.5 h1.5
  text "D" at -7.5,-19.5 h1.5
  text "C" at -2.5,-19.5 h1.5
  text "D" at 7.5,-19.5 h1.5
  text "C" at 12.5,-19.5 h1.5
  text "D" at 32.5,-19.5 h1.5
  text "C" at 37.5,-19.5 h1.5
  text "D" at 47.5,-19.5 h1.5
  text "C" at 52.5,-19.5 h1.5
  text "D" at 62.5,-19.5 h1.5
  text "C" at 69.5,-19.5 h1.5
  text "BODGEBOARD / 10080" at 27.45,-21.425 h2
  text "F" at -22.5,-21.5 h1.5
  text "E" at -17.5,-21.5 h1.5
  text "F" at -7.5,-21.5 h1.5
  text "E" at -2.5,-21.5 h1.5
  text "F" at 7.5,-21.5 h1.5
  text "E" at 12.5,-21.5 h1.5
  text "F" at 32.5,-21.5 h1.5
  text "E" at 37.5,-21.5 h1.5
  text "F" at 47.5,-21.5 h1.5
  text "E" at 52.5,-21.5 h1.5
  text "F" at 62.5,-21.5 h1.5
  text "E" at 69.5,-21.5 h1.5
  text "5" at -3.275,-34.153 h0.8
  text "6" at -0.025,-34.153 h0.8
  text "7" at 2.555,-34.153 h0.8
  text "8" at 5.055,-34.153 h0.8
  text "5" at 36.725,-34.153 h0.8
  text "6" at 39.975,-34.153 h0.8
  text "7" at 42.555,-34.153 h0.8
  text "8" at 45.055,-34.153 h0.8
  text "4" at -2.555,-45.35 h0.8
  text "3" at -0.03,-45.35 h0.8
  text "2" at 2.525,-45.35 h0.8
  text "1" at 4.3,-45.35 h0.8
  text "4" at 37.445,-45.35 h0.8
  text "3" at 39.97,-45.35 h0.8
  text "2" at 42.525,-45.35 h0.8
  text "1" at 44.3,-45.35 h0.8
  text "H" at -22.5,-58.5 h1.5
  text "G" at -18,-58.5 h1.5
  text "H" at -7.5,-58.5 h1.5
  text "G" at -3,-58.5 h1.5
  text "H" at 7.5,-58.5 h1.5
  text "G" at 12,-58.5 h1.5
  text "H" at 32.5,-58.5 h1.5
  text "G" at 37,-58.5 h1.5
  text "H" at 47.5,-58.5 h1.5
  text "G" at 52,-58.5 h1.5
  text "H" at 62.5,-58.5 h1.5
  text "G" at 69.5,-58.5 h1.5
Top Solder:
  drawing of 63 lines, arcs and shapes, not listed
Bottom Solder:
  drawing of 60 lines, arcs and shapes, not listed
Mechanical 13:
  circle w0.1: c-4.05,-2.5 r0.5
  lines w0.1: -4.95,-3.4 4.95,-3.4 4.95,3.4 -4.95,3.4 -4.95,-3.4
Mechanical 15:
  lines w0.05: -5.25,-43.85 -5.25,-34.15 5.25,-34.15 5.25,-43.85 -5.25,-43.85 ; -5.25,-4.85 5.25,-4.85 5.25,4.85 -5.25,4.85 -5.25,-4.85 ; 34.75,-43.85 34.75,-34.15 45.25,-34.15 45.25,-43.85 34.75,-43.85 ; 34.75,-4.85 34.75,4.85 45.25,4.85 45.25,-4.85 34.75,-4.85
  lines w0.1: -0.5,-39 0.5,-39 ; -0.5,0 0.5,0 ; 0,-39.5 0,-38.5 ; 0,-0.5 0,0.5 ; 39.5,-39 40.5,-39 ; 39.5,0 40.5,0 ; 40,-39.5 40,-38.5 ; 40,-0.5 40,0.5

## Text inside footprints (layer, text, board x,y; h text height)
Designator57: Top Assembly "1" at -3.45,1.6 h0.4
Designator57_1: Top Assembly "1" at 36.55,1.6 h0.4
Designator57_2: Top Assembly "1" at 36.55,-37.4 h0.4
Designator57_3: Top Assembly "1" at -3.45,-37.4 h0.4
Designator58: Bottom Assembly "1" at 2.925,0.775 h0.4
Designator58_1: Bottom Assembly "1" at 42.925,0.775 h0.4
Designator58_2: Bottom Assembly "1" at 42.925,-38.225 h0.4
Designator58_3: Bottom Assembly "1" at 2.925,-38.225 h0.4